# Altium PCB UART_CHANGER_ANDREY.PcbDoc
Units mm, origin at the board's own origin, x right, y up, seen from the top; angles counter-clockwise.
Board outline 55.96 x 65.35 mm, 2 copper layers (Top Layer, Bottom Layer), stack 1.032 mm thick; 90 components, 59 nets, 315 pads, 435 vias.
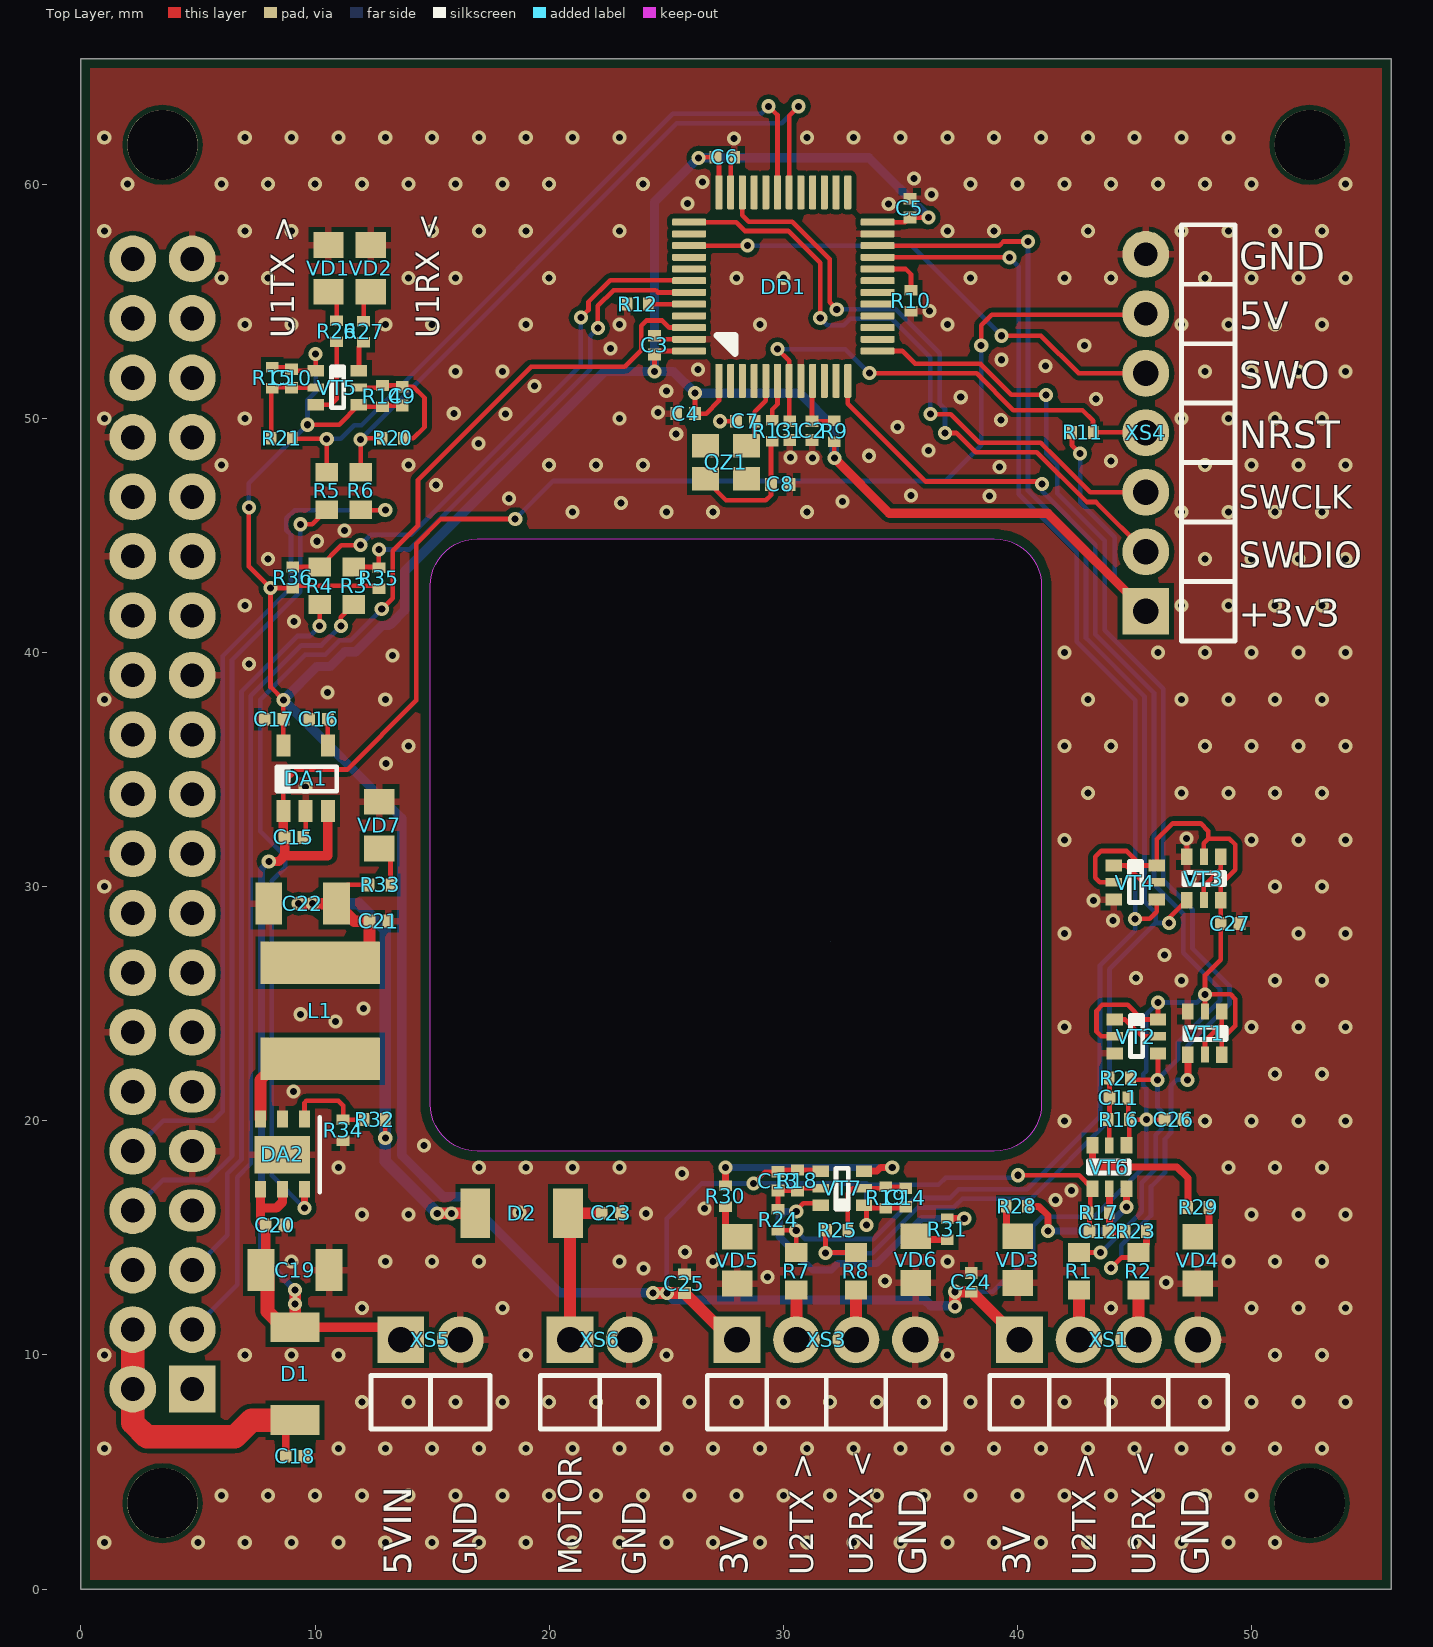
[diagram p0: Top Layer view]
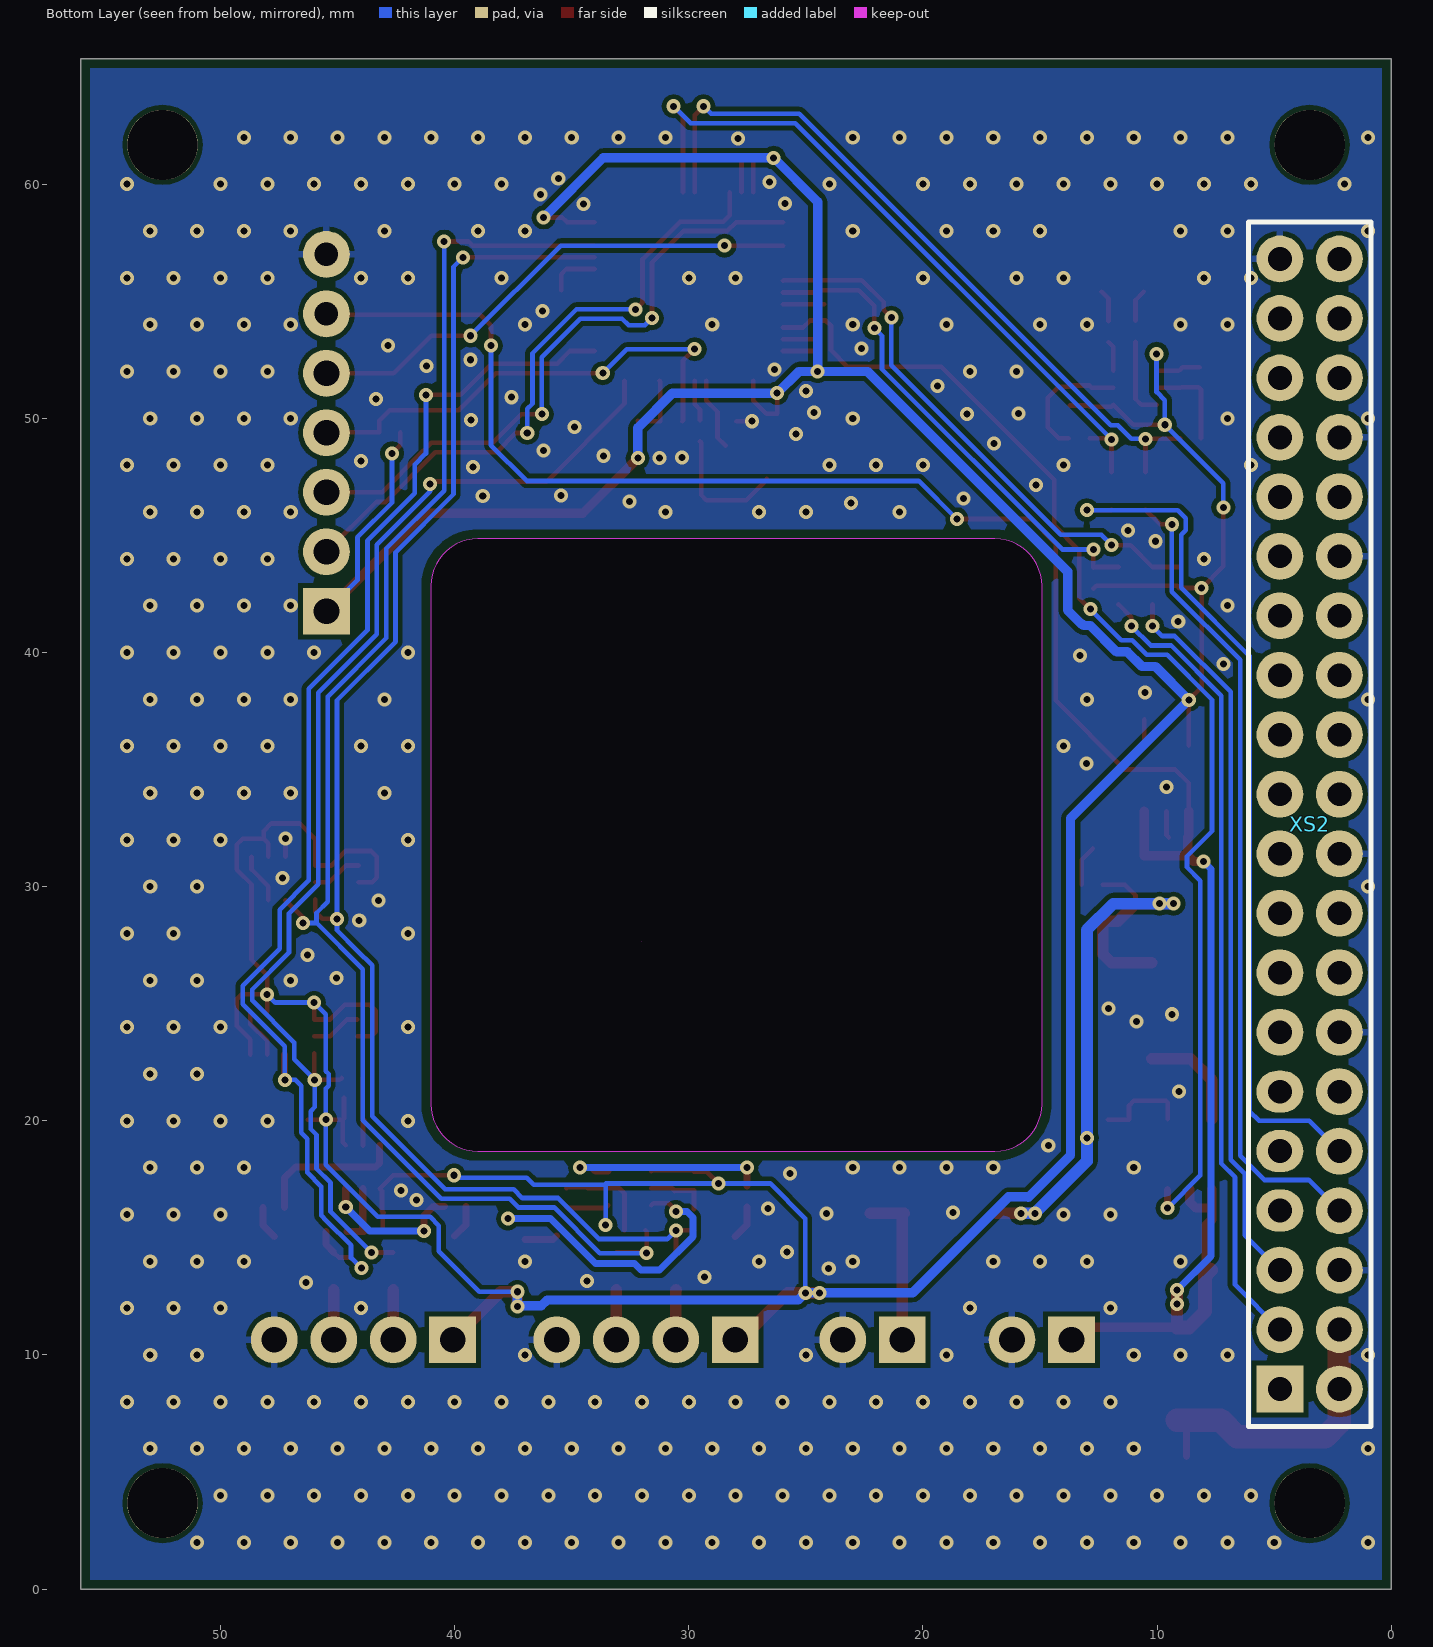
[diagram p1: Bottom Layer view, seen from below]

## Layer stack, top to bottom
Top Solder: solder mask 0.01, Solder Resist, Dk 3.5
Top Layer: signal copper 0.036
Dielectric 1: core 0.32, FR-4, Dk 4.8
Dielectric 2: prepreg 0.32, FR-4, Dk 4.8
Dielectric 3: core 0.32, FR-4, Dk 4.4
Bottom Layer: signal copper 0.036
Bottom Solder: solder mask 0.01, Solder Resist, Dk 3.5

## Board outline
0,0 55.963,0 55.963,65.35 0,65.35
cut-out: 14.918,20.712 14.918,42.843 cw(c16.925,42.843) 16.925,44.85 39.015,44.85 cw(c39.015,42.843) 41.022,42.843 41.022,20.712 cw(c39.015,20.712) 39.015,18.705 16.925,18.705 cw(c16.925,20.712)
cut-out: 32.025,27.675

## Design rules (kind name [scope] priority, off if disabled: settings)
BoardOutlineClearance [All] p1: gap=0.4 ignorepadtopadclearanceinfootprint=FALSE except(0: Arc-SplitContinuation Track-SplitContinuation SMDPad-SplitContinuation THPad-SplitContinuation Via-SplitContinuation Fill-SplitContinuation Poly-SplitContinuation Region-SplitContinuation Text-SplitContinuation)
Clearance Clearance_MAIN [All] p1: gap=0.2 ignorepadtopadclearanceinfootprint=FALSE
ComponentClearance ComponentClearance_XOR [InComponent('C2') or InComponent('C3') or InComponent('C7') vs InComponent('C4') or InComponent('C11')or InComponent('C9')] p1: gap=-5 collisioncheckmode=3 verticalgap=-5 showdistances=FALSE
ComponentClearance [All] p2: gap=0.1 collisioncheckmode=3 verticalgap=0.1 showdistances=FALSE
HoleSize [All] p1: absolutevalues=TRUE maxlimit=22 minlimit=0.3 maxpercent=80.000 minpercent=20.000
HoleToHoleClearance [All] p1: gap=0.3 allowstackedmicrovias=TRUE
MinimumAnnularRing [All] p1: minimumring=0.15
MinimumSolderMaskSliver [All] p1: minsoldermaskwidth=0.1
PlaneClearance [All] p1: clearance=0.25
PolygonConnect PolygonConnect_MAIN [All] p1: thpad.connectstyle=Relief thpad.reliefconductorwidth=0.3 thpad.reliefentries=4 thpad.polygonreliefangle="90 Angle" thpad.airgapwidth=0.2 smdpad.connectstyle=Relief smdpad.reliefconductorwidth=0.3 smdpad.reliefentries=4 smdpad.polygonreliefangle="90 Angle" smdpad.airgapwidth=0.2 via.connectstyle=Direct via.reliefconductorwidth=0.3 via.reliefentries=4 via.polygonreliefangle="90 Angle" via.airgapwidth=0.2
RoutingVias [All] p1: holewidth=0.3 width=0.6 viastyle="Through Hole" minholewidth=0.3 minwidth=0.6 maxholewidth=1 maxwidth=2
ShortCircuit ShortCircuit_ESD_RING [InNet('ESD_RING_A')] p1: allowed=TRUE
ShortCircuit [All] p2: allowed=FALSE
SilkToBoardRegionClearance [(ShowComment = 'True')] p1:
SilkToSilkClearance [All] p1: silktosilkclearance=0
SilkToSolderMaskClearance [IsPad] p1: minsilkscreentomaskgap=0.1 clearancetoexposedcopper=TRUE
SolderMaskExpansion SolderMaskExpansion_VIa [IsVia] p1: expansion=0.102 istentingtop=TRUE
SolderMaskExpansion [All] p2: expansion=0.05 istentingtop=FALSE
Width Width_MAIN [All] p1: maxlimit=5 minlimit=0.2 preferedwidth=0.2 substack1={708119B1-05ED-4D14-B21C-57B7C25CAC18} toplayer_{708119b1-05ed-4d14-b21c-57b7c25cac18}_minwidth=0.254 toplayer_{708119b1-05ed-4d14-b21c-57b7c25cac18}_maxwidth=0.254 toplayer_{708119b1-05ed-4d14-b21c-57b7c25cac18}_prefwidth=0.254 bottomlayer_{708119b1-05ed-4d14-b21c-57b7c25cac18}_minwidth=0.254 bottomlayer_{708119b1-05ed-4d14-b21c-57b7c25cac18}_maxwidth=1 bottomlayer_{708119b1-05ed-4d14-b21c-57b7c25cac18}_prefwidth=0.3
21 further rules are at their usual default settings.

## Classes and differential pairs
component class UART_CHANGER: C1 C2 C3 C4 C5 C6 C7 C8 DD1 QZ1 R1 R2 R3 R4 R5 R6 R7 R8 R9 R10 R11 R12 R13 R35 R36 VT1 VT2 VT3 VT4 XS1 XS2 XS3 XS4
component class POWER&INDICATION: C9 C10 C11 C12 C13 C14 C15 C16 C17 C18 C19 C20 C21 C22 C23 C24 C25 C26 C27 D1 D2 DA1 DA2 L1 R14 R15 R16 R17 R18 R19 R20 R21 R22 R23 R24 R25 R26 R27 R28 R29 R30 R31 R32 R33 R34 VD1 VD2 VD3 VD4 VD5 VD6 VD7 VT5 VT6 VT7 XS5 XS6

## Components (designator, comment, footprint, x,y, rotation, side; value= is the part's Value field where it differs from the comment)
C1 "10n" 0402#1 30.275,49.475 r270 top
C2 "100n" 0402#1 31.225,49.475 r270 top
C3 "100n" 0402#1 24.5,53.125 r90 top
C4 "100n" 0402#1 25.825,50.2 r180 top
C5 "100n" 0402#1 35.4,58.975 r90 top
C6 "100n" 0402#1 27.5,61.15 r180 top
C7 "10p" 0402#1 28.375,49.875 r180 top
C8 "10p" 0402#1 29.875,47.175 r0 top
C9 "10n" 0402#1 13.725,50.95 r90 top
C10 "10n" 0402#1 9,51.7 r270 top
C11 "10n" 0402#1 44.325,20.975 r180 top
C12 "10n" 0402#1 43.475,15.275 r0 top
C13 "10n" 0402#1 29.775,17.425 r270 top
C14 "10n" 0402#1 35.225,16.725 r90 top
C15 "100n" 0402#1 9.1,32.1 r0 top
C16 "100n" 0402#1 10.15,37.15 r180 top
C17 "100n" 0402#1 8.25,37.15 r180 top
C18 "100n" 0402#1 9.15,5.675 r0 top
C19 "47uF" 1206 9.15,13.625 r0 top
C20 "100n" 0402#1 8.3,15.55 r0 top
C21 "100n" 0402#1 12.725,28.525 r0 top
C22 "47uF" 1206 9.475,29.275 r180 top
C23 "100n" 0402#1 22.65,16.05 r0 top
C24 "100n" 0402#1 38.025,13.1 r90 top
C25 "100n" 0402#1 25.775,13.05 r90 top
C26 "100n" 0402#1 46.675,20.05 r0 top
C27 "100n" 0402#1 49.075,28.425 r0 top
D1 "SK56" SMB 9.15,9.2 r90 top
D2 "SK56" SMB 18.825,16.05 r0 top
DA1 "LP2985-30" SOT-23-5 9.6,34.625 r0 top
DA2 "ST1S06" DFN-6TP 8.6,18.55 r270 top
DD1 "STM32F103С8T6" LQFP-48-ST 30,55.625 r90 top
L1 "3u3" VLS6045 10.225,24.7 r90 top
QZ1 "12M" DSX221G 27.55,48.125 r90 top
R1 "10R" 0603 42.625,13.575 r90 top
R2 "10R" 0603 45.165,13.575 r90 top
R3 "10R" 0603 11.65,42.85 r270 top
R4 "10R" 0603 10.2,42.85 r270 top
R5 "10R" 0603 10.5,46.9 r270 top
R6 "10R" 0603 11.95,46.9 r270 top
R7 "10R" 0603 30.55,13.575 r90 top
R8 "10R" 0603 33.1,13.575 r90 top
R9 "0R" 0402#2 32.175,49.45 r90 top
R10 "10K" 0402#2 35.45,55.025 r90 top
R11 "10K" 0402#2 42.775,49.4 r0 top
R12 "10K" 0402#2 23.775,54.875 r0 top
R13 "0R" 0402#2 29.525,49.475 r270 top
R14 "4K7" 0402#2 12.875,50.95 r270 top
R15 "4K7" 0402#2 8.175,51.725 r90 top
R16 "4K7" 0402#2 44.325,20.05 r0 top
R17 "4K7" 0402#2 43.475,16.075 r180 top
R18 "4K7" 0402#2 30.6,17.45 r90 top
R19 "4K7" 0402#2 34.375,16.725 r270 top
R20 "4K7" 0402#2 13.325,49.15 r0 top
R21 "4K7" 0402#2 8.575,49.15 r180 top
R22 "4K7" 0402#2 44.375,21.825 r180 top
R23 "4K7" 0402#2 45.05,15.275 r180 top
R24 "4K7" 0402#2 29.775,15.775 r90 top
R25 "4K7" 0402#2 32.3,15.325 r0 top
R26 "100R" 0402#2 10.925,53.725 r270 top
R27 "100R" 0402#2 12.075,53.7 r270 top
R28 "100R" 0402#2 39.975,16.35 r0 top
R29 "100R" 0402#2 47.725,16.3 r180 top
R30 "100R" 0402#2 27.525,16.775 r90 top
R31 "100R" 0402#2 37,15.375 r90 top
R32 "150K" 0402#2 12.55,20.05 r0 top
R33 "100R" 0402#2 12.775,30.075 r180 top
R34 "47K" 0402#2 11.2,19.6 r90 top
R35 "10K" 0402#2 12.725,43.175 r90 top
R36 "10K" 0402#2 9.05,43.2 r90 top
VD1 "VL0805" VL0805 10.575,56.4 r270 top
VD2 "VL0805" VL0805 12.375,56.4 r270 top
VD3 "VL0805" VL0805 40,14.075 r90 top
VD4 "VL0805" VL0805 47.7,14.05 r90 top
VD5 "VL0805" VL0805 28.025,14.05 r90 top
VD6 "VL0805" VL0805 35.65,14.075 r90 top
VD7 "VL0805" VL0805 12.75,32.625 r270 top
VT1 "BC846BPDW1" SOT-363 48,23.75 r270 top
VT2 "BC846BPDW1" SOT-363 45.075,23.6 r0 top
VT3 "BC846BPDW1" SOT-363 47.95,30.35 r270 top
VT4 "BC846BPDW1" SOT-363 45.025,30.175 r0 top
VT5 "BC857BDW1T1G" SOT-363 10.95,51.3 r0 top
VT6 "BC857BDW1T1G" SOT-363 43.925,18.025 r90 top
VT7 "BC857BDW1T1G" SOT-363 32.525,17.125 r180 top
XS1 "PLS-4R" PLS-4R 40.085,10.65 r0 top
XS2 "PBD-40" PBВ-40 4.758,8.545 r90 bottom
XS3 "PLS-4R" PLS-4R 28.02,10.65 r0 top
XS4 "PLS-7R" PLS-7R 45.475,41.76 r90 top
XS5 "PLS-2R" PLS-2R 13.66,10.65 r0 top
XS6 "PLS-2R" PLS-2R 20.885,10.65 r0 top

## Footprints (in the part's own frame and the unit in brackets; to place one, negate y for a bottom-side part, rotate by r counter-clockwise, add the part's x,y. Pads: shape width x height; smd on the part's side, far side on the other; paste and mask are expansions set on the pad)
0402#1 [mm]
  rect 0.5x0.55 smd mask+0.05: 1(-0.4,0) 2(0.4,0)
  body extent -0.5,-0.25 0.5,0.25, height 0.55
0402#2 [mm]
  rect 0.45x0.55 smd paste-0.025 mask+0.05: 1(-0.45,0) 2(0.45,0)
  body extent -0.5,-0.25 0.5,0.25, height 0.38
0603 [mm]
  rect 0.8x0.95 smd mask+0.05: 1(-0.8,0) 2(0.8,0)
  body extent -0.8,-0.4 0.8,0.4, height 0.38
1206 [mm]
  rect 1.15x1.8 smd mask+0.1: 1(-1.45,0) 2(1.45,0)
  body extent -1.6,-0.8 1.6,0.8, height 1.25
DFN-6TP [mm]
  rect 0.71x0.46 smd: 1(-1.525,0.95) 2(-1.525,0.01) 3(-1.525,-0.93) 4(1.475,-0.93) 5(1.475,0.01) 6(1.475,0.95)
  rect 1.6x2.39 smd: 7(0,0)
  silkscreen extent -1.6,1.6 1.6,1.6, body extent -1.55,-1.49 1.55,1.51, height 0.78
DSX221G [mm]
  rect 1x1.15 smd mask+0.05: 1(-0.7,0.875) 2(-0.7,-0.875) 3(0.7,-0.875) 4(0.7,0.875)
  body extent -1,-1.25 1,1.25, height 0.9
LQFP-48-ST [mm]
  rrect30% 1.45x0.3 smd: 1(-4.025,2.75) 2(-4.025,2.25) 3(-4.025,1.75) 4(-4.025,1.25) 5(-4.025,0.75) 6(-4.025,0.25) 7(-4.025,-0.25) 8(-4.025,-0.75) 9(-4.025,-1.25) 10(-4.025,-1.75) 11(-4.025,-2.25) 12(-4.025,-2.75) 25(4.025,-2.75) 26(4.025,-2.25) 27(4.025,-1.75) 28(4.025,-1.25) 29(4.025,-0.75) 30(4.025,-0.25) 31(4.025,0.25) 32(4.025,0.75) 33(4.025,1.25) 34(4.025,1.75) 35(4.025,2.25) 36(4.025,2.75)
  rrect30% 0.3x1.45 smd: 13(-2.75,-4.025) 14(-2.25,-4.025) 15(-1.75,-4.025) 16(-1.25,-4.025) 17(-0.75,-4.025) 18(-0.25,-4.025) 19(0.25,-4.025) 20(0.75,-4.025) 21(1.25,-4.025) 22(1.75,-4.025) 23(2.25,-4.025) 24(2.75,-4.025) 37(2.75,4.025) 38(2.25,4.025) 39(1.75,4.025) 40(1.25,4.025) 41(0.75,4.025) 42(0.25,4.025) 43(-0.25,4.025) 44(-0.75,4.025) 45(-1.25,4.025) 46(-1.75,4.025) 47(-2.25,4.025) 48(-2.75,4.025)
  silkscreen extent -2.85,2.07 -2.09,2.83, body extent -4.51,-4.51 4.51,4.51, height 1.55
PBВ-40 [mm]
  rect 2x2 hole 1.016: 1(0,0)
  round 2 hole 1.016: 2(0,-2.54) 3(2.54,0) 4(2.54,-2.54) 5(5.08,0) 6(5.08,-2.54) 8(7.62,-2.54) 10(10.16,-2.54) 12(12.7,-2.54) 13(15.24,0) 14(15.24,-2.54) 15(17.78,0) 16(17.78,-2.54) 17(20.32,0) 18(20.32,-2.54) 19(22.86,0) 20(22.86,-2.54) 21(25.4,0) 22(25.4,-2.54) 23(27.94,0) 24(27.94,-2.54) 25(30.48,0) 26(30.48,-2.54) 27(33.02,0) 28(33.02,-2.54) 29(35.56,0) 30(35.56,-2.54) 31(38.1,0) 32(38.1,-2.54) 33(40.64,0) 34(40.64,-2.54) 35(43.18,0) 36(43.18,-2.54) 37(45.72,0) 38(45.72,-2.54) 39(48.26,0) 40(48.26,-2.54)
  oval 1.8x2 hole 1.016: 7(7.62,0) 9(10.16,0) 11(12.7,0)
  silkscreen extent -1.6,-3.89 49.84,1.34, body extent -1.52,-3.79 49.78,1.25, height 8.55
PLS-2R [mm]
  rect 2x2 hole 1.1: 1(0,0)
  round 2 hole 1.1: 2(2.54,0)
  silkscreen extent -1.27,-3.81 3.81,-1.52, body extent -1.27,-10.03 3.81,0.33, height 2.57
PLS-4R [mm]
  rect 2x2 hole 1.1: 1(0,0)
  round 2 hole 1.1: 2(2.54,0) 3(5.08,0) 4(7.62,0)
  silkscreen extent -1.27,-3.81 8.89,-1.52, body extent -1.27,-10.03 8.89,0.33, height 2.57
PLS-7R [mm]
  rect 2x2 hole 1.1: 1(0,0)
  round 2 hole 1.1: 2(2.54,0) 3(5.08,0) 4(7.62,0) 5(10.16,0)
  round 2 hole 1: 6(12.7,0) 7(15.24,0)
  silkscreen extent -1.27,-3.81 16.51,-1.52, body extent -1.27,-10.03 16.51,0.33, height 2.57
SMB [mm]
  rect 1.27x2.1 smd: 1(-1.98,0) 2(1.98,0)
  body extent -2.6,-1.8 2.6,1.8, height 2.4
SOT-23-5 [mm]
  rect 0.6x0.95 smd mask+0.05: 1(-0.95,-1.4) 2(0,-1.4) 3(0.95,-1.4) 4(0.95,1.4) 5(-0.95,1.4)
  silkscreen extent -1.23,-0.55 1.32,0.5, body extent -1.5,-1.5 1.5,1.5, height 1.3
SOT-363 [mm]
  rect 0.7x0.5 smd mask+0.05: 1(-0.92,0.725) 3(-0.92,-0.725) 4(0.925,-0.725) 6(0.925,0.725)
  rect 0.7x0.35 smd mask+0.05: 2(-0.92,0.009) 5(0.92,0.009)
  silkscreen extent -0.3,-0.85 0.32,0.93, body extent -1.06,-1.09 1.06,1.11, height 1.05
VL0805 [mm]
  rect 1.1x1.3 smd: 1(1,0) 2(-1,0)
  body extent -1.01,-0.62 1.01,0.63, height 1.1
VLS6045 [mm]
  rect 1.8x5.1 smd: 1(-2.05,0) 2(2.05,0)
  body extent -3,-3 3,3, height 4.54

## Part data
C1 C7 C8 C9 C10 C11 C12 C13 C14: library part C000001, "CAP 0402 100n", Manufacturer=Murata, Operating Temperature="-55°C ~ 155°C", Package=0, Tolerance=±1%, Voltage=100V, Check Footprint=A, Check Symbol=A, Part Number=C000001
C2 C3 C4 C5 C6 C15 C16 C17 C18 C20 C21 C23 C24 C25 C26 C27: library part C000001, "CAP 0402 100n", Manufacturer=Murata, Operating Temperature="-55°C ~ 155°C", Package=0402, Tolerance=±1%, Voltage=10V, Check Footprint=A, Check Symbol=A, Part Number=C000001
C19 C22: library part C000003, "CAP 1206 47uF 10V", Manufacturer=Murata, Operating Temperature="-55°C ~ 155°C", Package=1206, Tolerance=±1%, Voltage=10V, Check Footprint=A, Check Symbol=A, Part Number=C000003
D1 D2: library part VD00002, "60V 5A Schottky Diode", Manufacturer=SMC, Operating Temperature="-50°C ~ 150°C", Package=SMB, Check Footprint=A, Check Symbol=A, Part Number=VD00002
DA1: library part U00007, "150-mA Low-noise Low-dropout Regulator With Shutdown", Manufacturer=TI, Operating Temperature="-40°C ~ 125°C", Package=SOT-23-5, Check Footprint=B, Check Symbol=B, HelpURL=https://static.chipdip.ru/lib/170/DOC001170968.pdf, Part Number=U00007
DA2: library part U00027, "Synchronous rectification with inhibit, 1.5 A, 1.5 MHz fixed or / adjustable, step-down switching regulator", Manufacturer=ST, Operating Temperature="-30°C ~ 125°C", Package=DFN-6, Check Footprint=A, Check Symbol=A, Part Number=U00027
DD1: library part U00026, "32 Bit 72Mhz ARM MCU", Manufacturer=ST, Operating Temperature="-40°C ~ 85°C", Package=LQFP-48-ST, Check Footprint=A, Check Symbol=A, Part Number=U00026
L1: library part IND000010, "3u3H smd power induction", Manufacturer=TDK, Manufacturer Part Number=VLS6045EX-3R3N, Operating Temperature="-40°C ~ 105°C", Package=VLS6045, Check Footprint=A, Check Symbol=A, HelpURL=https://product.tdk.com/info/en/catalog/datasheets/inductor_commercial_power_vls6045ex_en.pdf, Part Number=IND000010
QZ1: library part QZ00002, "12M SMD QUARTZ", Manufacturer=NDK, Package=DSX221G, Check Footprint=A, Check Symbol=A, Part Number=QZ00002
R1 R2 R3 R4 R5 R6 R7 R8: library part R000195, "RES SMD", Manufacturer="Rohm Semiconductor", Operating Temperature="-55°C ~ 155°C", Package=0603, Power=0,1W, Temperature Coefficient=±200ppm/°C, Tolerance=±1%, Check Footprint=A, Check Symbol=A, HelpURL=http://rohmfs.rohm.com/en/products/databook/datasheet/passive/resistor/chip_resistor/esr.pdf, Part Number=R000195
R9 R13: library part R000001, "RES SMD", Manufacturer="Rohm Semiconductor", Operating Temperature="-55°C ~ 155°C", Package=0402, Power=0.063W, Temperature Coefficient=±200ppm/°C, Tolerance=±1%, Check Footprint=A, Check Symbol=A, HelpURL=http://rohmfs.rohm.com/en/products/databook/datasheet/passive/resistor/chip_resistor/esr.pdf, Part Number=R000001
R10 R11 R12 R35 R36: library part R000098, "RES SMD", Manufacturer="Rohm Semiconductor", Operating Temperature=0, Package=0402, Temperature Coefficient=±200ppm/°C, Tolerance=±1%, Check Footprint=A, Check Symbol=A, HelpURL=http://rohmfs.rohm.com/en/products/databook/datasheet/passive/resistor/chip_resistor/esr.pdf, Part Number=R000098, Power=0
R14 R15 R16 R17 R18 R19 R20 R21 R22 R23 R24 R25: library part R000090, "RES SMD", Manufacturer="Rohm Semiconductor", Operating Temperature="-55°C ~ 155°C", Package=0402, Power=0.063W, Temperature Coefficient=±200ppm/°C, Tolerance=±1%, Check Footprint=A, Check Symbol=A, HelpURL=http://rohmfs.rohm.com/en/products/databook/datasheet/passive/resistor/chip_resistor/esr.pdf, Part Number=R000090
R26 R27 R28 R29 R30 R31 R33: library part R000050, "RES SMD", Manufacturer="Rohm Semiconductor", Operating Temperature="-55°C ~ 155°C", Package=0402, Power=0.063W, Temperature Coefficient=±200ppm/°C, Tolerance=±1%, Check Footprint=A, Check Symbol=A, HelpURL=http://rohmfs.rohm.com/en/products/databook/datasheet/passive/resistor/chip_resistor/esr.pdf, Part Number=R000050
R32: library part R000126, "RES SMD", Manufacturer="Rohm Semiconductor", Operating Temperature="-55°C ~ 155°C", Package=0402, Power=0.063W, Temperature Coefficient=±200ppm/°C, Tolerance=±1%, Check Footprint=A, Check Symbol=A, HelpURL=http://rohmfs.rohm.com/en/products/databook/datasheet/passive/resistor/chip_resistor/esr.pdf, Part Number=R000126
R34: library part R000114, "RES SMD", Manufacturer="Rohm Semiconductor", Operating Temperature="-55°C ~ 155°C", Package=0402, Power=0.063W, Temperature Coefficient=±200ppm/°C, Tolerance=±1%, Check Footprint=A, Check Symbol=A, HelpURL=http://rohmfs.rohm.com/en/products/databook/datasheet/passive/resistor/chip_resistor/esr.pdf, Part Number=R000114
VD1 VD2 VD3 VD4 VD5 VD6 VD7: library part LED000002, "SMD LED 0805", Color=BLUE, Operating Temperature="-40°C ~ 85°C", Package=O805, Voltage=3,2, Check Footprint=A, Check Symbol=A, Part Number=LED000002
VT1 VT2 VT3 VT4: library part VT00002, "60V 100mA PNP/NPN Transistor", Manufacturer=ON, Operating Temperature="-55°C ~ 150°C", Package=SOT-363, Power=1,380W, Check Footprint=A, Check Symbol=A, HelpURL=http://shop.electronshik.ru/z/Datasheet/B/BC846BPDW1T1-Dhj.pdf, Part Number=VT00002
VT5 VT6 VT7: library part VT00009, "45V 100mA Dual PNP Transistor", Manufacturer=ON, Operating Temperature="-55°C ~ 150°C", Package=SOT-363, Power=0,380W, Check Footprint=A, Check Symbol=A, HelpURL=https://www.onsemi.com/pub/Collateral/BC856BDW1T1-D.PDF, Part Number=VT00009
XS1 XS3: library part XS00013, "4 PIN PLS right angle", Manufacturer=WE, Package=PLS, Check Footprint=A, Check Symbol=A, Part Number=XS00013
XS2: library part XS00012, Check Footprint=A, Check Symbol=A, Package=PBD-40, Part Number=XS00012
XS4: library part XS00003, "7 PIN PLS right angle", Manufacturer=TE, Package=PLS, Check Footprint=A, Check Symbol=A, Part Number=XS00003
XS5 XS6: library part XS00002, "2 PIN PLS right angle", Manufacturer=TE, Package=PLS, Check Footprint=A, Check Symbol=A, Part Number=XS00002

## Free pads (board coordinates)
  round 3 hole 3 unplated: 1(3.488,3.675) 1(3.488,61.675) 1(52.475,3.675) 1(52.475,61.675)

## Via types
v1: diameter 0.6, hole 0.3, Top Layer to Bottom Layer, tented both sides, 435 vias

## Nets (pads, with @x,y where several pads share a name; then routed paths per layer and width w, separated by ;. In a path a pad name is that pad's centre, name@x,y a point inside that pad or via, vN(x,y) a via of type N, cw(c..) or ccw(c..) an arc to the next point about the centre after c; other vN are vias at no path point)
3v0_FB: DA2.1 R32.1 R34.2 | length 4
  Top Layer w0.2: DA2.1 9.55,20.775 9.625,20.85 11,20.85 11.2,20.65 R34.2 R32.1
5v_EXT: C15.1 C19.1 C20.1 D1.2 DA1.1 DA1.3 DA2.4 DA2.5 XS4.6 XS5.1 | length 93.6
  Top Layer w0.2: DA1.1 8.65,34.425 9.225,35 11.375,35 14.325,37.95 14.325,44.65 15.375,45.7 v1(18.55,45.7) ; v1(38.45,53.1) 38.45,53.975 38.9,54.425 45.44,54.425 XS4.6
  Top Layer w0.4: DA2.4 7.67,16.275 ; C19.1 7.9,13.825 C20.1 7.67,15.78 7.67,16.275 ; v1(8.025,31.075) 8.45,31.075 8.7,31.325 ; DA2.5 8.61,16.535 8.35,16.275 7.67,16.275 ; DA1.1 8.65,32.15 C15.1 8.7,31.325 ; D1.2 13.13,11.18 XS5.1 ; DA1.3 10.55,31.325 8.7,31.325
  Top Layer w0.5: D1.2@9.15,11.15 v1(9.15,12.175) v1(9.15,12.775)
  Top Layer w0.6: C19.1 7.962,13.363 7.962,11.863 8.645,11.18 D1.2
  Bottom Layer w0.2: v1(18.55,45.7) 20.175,47.325 36.925,47.325 38.45,48.85 v1(38.45,53.1)
  Bottom Layer w0.3: v1(8.025,31.075) 7.708,30.758 7.708,14.217 v1(9.15,12.775)
5v_RPI: C18.1 D1.1 XS2.2 XS2.4 | length 13.2
  Top Layer w0.3: C18.1 8.75,6.82 D1.1
  Top Layer w1: XS2.4 XS2.2 2.218,7.107 2.825,6.5 6.575,6.5 7.295,7.22 D1.1
+3v0: C3.1 C4.1 C5.1 C6.2 C9.1 C10.1 C11.1 C12.1 C13.1 C14.1 C17.1 C24.1 C25.1 C26.1 C27.1 DA1.5 DD1.1 DD1.24 DD1.36 DD1.48 R9.1 R11.1 R14.2 R15.2 R16.2 R17.2 R18.2 R19.2 R35.1 R36.1 VT1.2 VT1.6 VT2.2 VT2.6 VT3.2 VT3.6 VT4.2 VT4.6 VT5.1 VT5.4 VT6.1 VT6.4 VT7.1 VT7.4 XS1.1 XS3.1 XS4.1 | length 260.3
  Top Layer w0.2: v1(7.175,46.2) 7.175,43.675 v1(8.1,42.75) ; R15.2 8.925,52.175 C10.1 9.075,52.025 VT5.1 10.03,52.745 v1(10.025,52.75) ; DA1.5 C17.1 v1(8.65,37.975) 8.1,38.525 v1(8.1,42.75) ; v1(9.675,49.725) 11.025,49.725 VT5.4 11.95,50.5 R14.2 12.925,50.55 C9.1 ; R35.1 12.6,42.85 9.15,42.85 R36.1 v1(8.1,42.75) ; v1(24.5,52) C3.1 24.65,52.875 DD1.48 ; v1(26.225,51.075) C4.1 26.7,50.2 27.25,50.75 DD1.1 ; v1(26.375,61.125) 26.4,61.15 C6.2 27.25,61 DD1.36 ; v1(28.725,17.325) 29.225,17.825 C13.1 29.85,17.9 R18.2 31.55,17.9 VT7.4 ; v1(32.175,48.3) R9.1 ; VT7.1 VT7.1@33.55,16.295 ; v1(33.55,15.55) VT7.1@33.55,16.295 ; DD1.24 35.2,58.375 C5.1 v1(36.2,58.575) ; C14.1 35.175,16.275 R19.2 33.57,16.275 VT7.1@33.55,16.295 ; v1(40.025,17.675) 42.63,17.675 VT6.1 43.105,17.01 43.105,16.155 R17.2 43.075,16.025 C12.1 ; R11.1 42.325,48.85 v1(42.675,48.5) ; VT4.2 43.516,30.184 43.325,30.375 43.325,31.275 43.575,31.525 44.65,31.525 45.275,30.9 VT4.6 45.95,32.025 46.625,32.7 47.825,32.7 48.15,32.375 48.15,32.05 ; VT2.2 43.566,23.609 43.375,23.8 43.375,24.7 43.625,24.95 44.7,24.95 45.325,24.325 VT2.6 v1(46,25.05) ; VT6.4 44.775,19.075 R16.2 ; C11.1 44.725,20.1 R16.2 ; C26.1 v1(45.5,20.05) R16.2 ; VT3.2 47.959,31.859 48.15,32.05 ; VT1.2 v1(48.009,25.4) ; VT1.6 48.725,23.475 49.3,24.05 49.3,25.2 49.1,25.4 v1(48.009,25.4) ; v1(48.009,25.4) 48.009,26.209 48.675,26.875 C27.1 VT3.6 48.675,30.1 49.3,30.725 49.3,31.8 49.05,32.05 48.15,32.05
  Top Layer w0.4: v1(32.175,48.3) 34.525,45.95 41.285,45.95 XS4.1
  Top Layer w0.5: v1(24.425,12.65) v1(25.025,12.65) C25.1 27.775,10.65 XS3.1 ; v1(37.325,12.075) v1(37.325,12.7) C24.1 38.035,12.7 XS1.1
  Bottom Layer w0.2: v1(7.175,46.2) 7.175,47.225 v1(9.675,49.725) 9.675,50.775 10.025,51.125 v1(10.025,52.75) ; v1(25.025,12.65) 25.025,15.825 26.525,17.325 v1(28.725,17.325) 33.55,17.325 v1(33.55,15.55) ; 33.55,17.275 36.625,17.275 36.925,17.575 40.025,17.575 v1(40.025,17.675) ; v1(37.325,12.7) 38.95,12.7 40.675,14.425 40.675,15.524 41.051,15.9 43.275,15.9 45.5,18.125 v1(45.5,20.05) 45.5,21.376 45.375,21.501 45.375,21.999 45.5,22.124 45.5,24.55 v1(46,25.05) 47.659,25.05 v1(48.009,25.4) ; v1(42.675,48.5) 42.675,46.388 44.15,44.913 44.15,43.085 XS4.1
  Bottom Layer w0.4: v1(32.175,48.3) 32.175,49.6 30.7,51.075 v1(26.225,51.075) 25.3,52 v1(24.5,52) ; v1(36.2,58.575) 33.65,61.125 v1(26.375,61.125) 24.5,59.25 v1(24.5,52) ; v1(37.325,12.7) v1(37.325,12.075) 37.3,12.1 36.3,12.1 36.05,12.35 25.325,12.35 v1(25.025,12.65) v1(24.425,12.65) 20.45,12.65 16.35,16.75 15.53,16.75 15.503,16.722 13.7,18.525 13.7,32.925 v1(8.65,37.975) 10.075,39.4 10.648,39.4 11.273,40.025 11.732,40.025 12.857,41.15 13.14,41.15 13.19,41.2 13.225,41.2 13.825,41.8 13.825,43.458 22.367,52 v1(24.5,52)
+3v0_Motor: C23.1 D2.2 XS6.1 | length 6.9
  Top Layer w0.5: XS6.1 20.885,15.97 D2.2 C23.1
+3v0a: C2.1 DD1.9 R9.2 | length 2.7
  Top Layer w0.2: DD1.9 31.225,51.575 C2.1 32.15,49.875 R9.2
+3v3: C21.1 C22.1 D2.1 L1.2 R32.2 R33.2 | length 29.1
  Top Layer w0.2: C22.1 10.925,29.625 11.375,30.075 R33.2 ; v1(13,19.275) R32.2
  Top Layer w0.5: v1(9.3,29.275) v1(9.9,29.275) C22.1 11.675,28.525 C21.1 12.325,27.125 11.95,26.75 L1.2 ; v1(15.22,16.05) v1(15.82,16.05) D2.1
  Bottom Layer w0.5: v1(9.3,29.275) v1(9.9,29.275) 11.875,29.275 13,28.15 v1(13,19.275) 13,18.27 v1(15.22,16.05) v1(15.82,16.05)
BOOT0: DD1.44 R12.2 | length 1.8
  Top Layer w0.2: R12.2 DD1.44
BOOT1: DD1.20 R10.2 | length 2.2
  Top Layer w0.2: DD1.20 35.225,56.375 35.45,56.15 R10.2
BYP: C16.1 DA1.4 | length 1.1
  Top Layer w0.2: DA1.4 C16.1
EN_MOTOR: DA2.6 DD1.46 | length 51.9
  Top Layer w0.2: v1(12.85,41.85) 13.325,42.325 13.325,44.35 14.4,45.425 14.4,47.375 19.225,52.2 23.225,52.2 23.925,52.9 23.925,53.95 24.15,54.175 24.825,54.175 25.125,53.875 DD1.46
  Top Layer w0.3: v1(9.55,16.275) DA2.6
  Bottom Layer w0.2: v1(9.55,16.275) 8.158,17.667 8.158,30.258 8.725,30.825 8.725,31.3 7.658,32.367 7.658,37.983 9.575,39.9 10.425,39.9 10.441,39.9 11.066,40.525 11.525,40.525 v1(12.85,41.85)
GND: C1.2 C2.2 C3.2 C4.2 C5.2 C6.1 C7.2 C8.2 C15.2 C16.2 C17.2 C18.2 C19.2 C20.2 C21.2 C22.2 C23.2 C24.2 C25.2 C26.2 C27.2 DA1.2 DA2.2 DA2.7 DD1.8 DD1.23 DD1.35 DD1.47 R10.1 R12.1 R34.1 VD1.2 VD2.2 VD3.2 VD4.2 VD5.2 VD6.2 VD7.2 VT1.3 VT2.3 VT3.3 VT4.3 XS1.4 XS2.6 XS2.9 XS2.14 XS2.20 XS2.25 XS2.30 XS2.34 XS2.39 XS3.4 XS4.7 XS5.2 XS6.2 | length 5.7
  Top Layer w0.2: C15.2 9.6,32.2 DA1.2 ; C3.2 24.65,53.375 DD1.47 ; v1(27.3,49.875) C7.2 ; DD1.35 27.75,61 C6.1 ; VT3.3 v1(47.225,32.05)
  other v1: 1,2 5,2 7,2 9,2 11,2 13,2 15,2 17,2 19,2 21,2 23,2 25,2 27,2 29,2 31,2 33,2 35,2 37,2 39,2 41,2 43,2 45,2 47,2 49,2 51,2 6,4 8,4 10,4 12,4 14,4 16,4 18,4 20,4 22,4 24,4 26,4 28,4 30,4 32,4 34,4 36,4 38,4 40,4 42,4 44,4 46,4 48,4 50,4 1,6 11,6 13,6 15,6 17,6 19,6 21,6 23,6 25,6 27,6 29,6 31,6 33,6 35,6 37,6 39,6 41,6 43,6 45,6 47,6 49,6 51,6 53,6 12,8 14,8 16,8 18,8 20,8 22,8 24,8 26,8 28,8 30,8 32,8 34,8 36,8 38,8 40,8 42,8 44,8 46,8 48,8 50,8 52,8 54,8 1,10 7,10 9,10 11,10 19,10 25,10 37,10 51,10 53,10 12,12 18,12 44,12 50,12 52,12 54,12 46.35,13.1 34.35,13.15 29.325,13.325 24.025,13.7 9,14 13,14 15,14 17,14 23,14 27,14 37,14 49,14 51,14 53,14 25.8,14.4 12,16 14,16 50,16 52,16 54,16 24.125,16.05 18.725,16.075 26.625,16.25 41.625,16.625 42.3,17.025 25.675,17.75 11,18 17,18 19,18 21,18 23,18 49,18 51,18 53,18 14.65,18.95 42,20 48,20 50,20 52,20 54,20 9.075,21.25 51,22 53,22 42,24 50,24 52,24 54,24 10.875,24.25 9.375,24.55 12.075,24.8 47,26 51,26 53,26 45.05,26.1 46.275,27.075 42,28 52,28 54,28 44.075,28.55 43.25,29.4 1,30 51,30 53,30 47.35,30.375 42,32 50,32 52,32 54,32 43,34 47,34 49,34 51,34 53,34 9.6,34.25 13.025,35.25 14,36 42,36 44,36 48,36 50,36 52,36 54,36 1,38 13,38 43,38 47,38 49,38 51,38 53,38 10.525,38.3 7.175,39.5 13.3,39.875 42,40 46,40 48,40 50,40 52,40 54,40 9.1,41.325 7,42 47,42 49,42 51,42 53,42 8,44 48,44 50,44 52,44 54,44 10.075,44.75 11.25,45.2 21,46 25,46 27,46 31,46 47,46 49,46 51,46 53,46 23.075,46.375 32.525,46.45 18.275,46.575 38.8,46.675 35.45,46.7 15.175,47.15 39.225,47.925 6,48 14,48 20,48 22,48 24,48 48,48 50,48 52,48 54,48 44,48.175 31.25,48.3 30.3,48.325 33.65,48.4 36.2,48.625 16.975,48.925 25.425,49.325 34.875,49.625 39.3,49.925 1,50 7,50 23,50 47,50 49,50 51,50 53,50 18.125,50.175 15.925,50.2 24.65,50.25 43.35,50.825 37.575,50.9 25,51.175 19.375,51.375 16,52 18,52 48,52 50,52 52,52 54,52 26.35,52.075 41.2,52.225 39.325,52.5 22.625,52.975 42.85,53.1 7,54 9,54 13,54 15,54 19,54 23,54 29,54 37,54 47,54 49,54 51,54 53,54 36.25,54.575 6,56 8,56 14,56 16,56 20,56 28,56 30,56 38,56 42,56 44,56 48,56 50,56 52,56 54,56 1,58 7,58 9,58 15,58 17,58 19,58 23,58 37,58 39,58 43,58 47,58 49,58 51,58 53,58 34.5,59.15 25.9,59.175 36.325,59.55 2,60 6,60 8,60 10,60 12,60 14,60 16,60 18,60 20,60 24,60 38,60 40,60 42,60 44,60 46,60 48,60 50,60 54,60 26.55,60.1 35.575,60.25 27.9,61.95 1,62 7,62 9,62 11,62 13,62 15,62 17,62 19,62 21,62 23,62 31,62 33,62 35,62 37,62 39,62 41,62 43,62 45,62 47,62 49,62
I2C_CLK: DD1.42 R4.1 R36.2 | length 23.4
  Top Layer w0.2: R36.2 R4.1 11.125,44.575 11.968,44.575 v1(11.949,44.594) ; v1(21.35,54.3) 21.675,54.625 21.675,54.7 21.675,54.966 22.609,55.9 25.95,55.9 DD1.42
  Bottom Layer w0.2: v1(11.949,44.594) 12.38,45.025 14.109,45.025 21.35,52.266 v1(21.35,54.3)
I2C_SDA: DD1.43 R3.1 R35.2 | length 21.1
  Top Layer w0.2: R3.1 12.7,43.65 R35.2 v1(12.725,44.4) ; v1(22.075,53.85) 22.075,54.8 22.75,55.475 24.549,55.475 24.649,55.375 DD1.43
  Bottom Layer w0.2: v1(12.725,44.4) 14.05,44.4 21.75,52.1 21.75,53.525 v1(22.075,53.85)
NetC8_1: C8.1 QZ1.1 R13.2 | length 5.6
  Top Layer w0.2: QZ1.1 26.675,47.375 27.55,46.5 29.25,46.5 29.475,46.725 C8.1 29.475,48.975 R13.2
NetC9_2: C9.2 R14.1 R20.2 VT5.5 | length 5.4
  Top Layer w0.2: VT5.5 12.784,51.309 R14.1 13.675,51.4 C9.2 14.2,51.35 14.675,50.875 14.675,49.625 14.2,49.15 R20.2
NetC10_2: C10.2 R15.1 R21.2 VT5.2 | length 4
  Top Layer w0.2: R21.2 8.125,51.225 R15.1 8.225,51.325 8.975,51.325 C10.2 10.021,51.3 VT5.2
NetC11_2: C11.2 R16.1 R22.2 VT6.5 | length 2.9
  Top Layer w0.2: VT6.5 43.916,20.009 R16.1 43.925,20.1 C11.2 R22.2
NetC12_2: C12.2 R17.1 R23.2 VT6.2 | length 2.6
  Top Layer w0.3: VT6.2 43.925,17.096 R17.1 43.925,15.325 C12.2 R23.2
NetC13_2: C13.2 R18.1 R24.2 VT7.5 | length 2.7
  Top Layer w0.2: R24.2 C13.2 30.225,17.025 30.575,17.025 R18.1 30.716,17.116 VT7.5
NetC14_2: C14.2 R19.1 R25.2 VT7.2 | length 4.2
  Top Layer w0.2: R25.2 32.75,16.9 32.966,17.116 VT7.2 34.316,17.116 R19.1 35.175,17.175 C14.2
NetR26_1: R26.1 VD1.1 | length 1.4
  Top Layer w0.2: VD1.1 10.925,55.05 R26.1
NetR26_2: R26.2 VT5.3 | length 3.4
  Top Layer w0.2: VT5.3 10.675,50.575 10.925,50.825 R26.2
NetR27_1: R27.1 VD2.1 | length 1.4
  Top Layer w0.2: R27.1 12.075,55.1 VD2.1
NetR27_2: R27.2 VT5.6 | length 1.3
  Top Layer w0.2: VT5.6 11.875,53.05 R27.2
NetR28_1: R28.1 VD3.1 | length 1.5
  Top Layer w0.3: R28.1 39.525,15.55 VD3.1
NetR28_2: R28.2 VT6.3 | length 6.2
  Top Layer w0.3: R28.2 40.9,16.35 41.3,15.95 v1(41.3,15.3) ; v1(44.65,16.324) VT6.3
  Bottom Layer w0.3: v1(41.3,15.3) 43.626,15.3 v1(44.65,16.324)
NetR29_1: R29.1 VD4.1 | length 1.4
  Top Layer w0.3: VD4.1 48.175,15.525 R29.1
NetR29_2: R29.2 VT6.6 | length 6.3
  Top Layer w0.3: VT6.6 43.2,18.2 43.375,18.025 46.8,18.025 47.275,17.55 R29.2
NetR30_1: R30.1 VD5.1 | length 1.5
  Top Layer w0.3: R30.1 27.525,15.55 VD5.1
NetR30_2: R30.2 VT7.3 | length 9.2
  Top Layer w0.3: R30.2 v1(27.525,18) ; VT7.3 33.994,17.85 34.144,18 v1(34.65,18)
  Bottom Layer w0.3: v1(27.525,18) v1(34.65,18)
NetR31_1: R31.1 VD6.1 | length 1.4
  Top Layer w0.3: VD6.1 35.8,14.925 R31.1
NetR31_2: R31.2 VT7.6 | length 13.1
  Top Layer w0.2: v1(30.55,16.125) 30.5,16.125 30.85,16.475 31.525,16.475 VT7.6
  Top Layer w0.3: R31.2 v1(37.725,15.825)
  Bottom Layer w0.3: v1(30.55,16.125) 30.075,16.125 29.825,15.875 29.825,15.05 31.25,13.625 32.05,13.625 32.325,13.9 33.986,13.9 35.911,15.825 v1(37.725,15.825)
NetR33_1: R33.1 VD7.1 | length 1.7
  Top Layer w0.2: VD7.1 13.225,31.15 R33.1
NetVT1_1: VT1.1 VT1.5 | length 2.1
  Top Layer w0.2: VT1.5 48.009,23.41 48.725,24.126 VT1.1
NetVT2_1: VT2.1 VT2.5 | length 2.1
  Top Layer w0.2: VT2.1 44.6,24.325 45.316,23.609 VT2.5
NetVT3_1: VT3.1 VT3.5 | length 2.1
  Top Layer w0.2: VT3.5 47.959,30.018 48.675,30.734 VT3.1
NetVT4_1: VT4.1 VT4.5 | length 2.1
  Top Layer w0.2: VT4.1 44.65,30.9 45.366,30.184 VT4.5
NRST: C1.1 DD1.7 R11.2 XS4.4 | length 20.8
  Top Layer w0.2: v1(29.75,52.95) 30.25,52.45 DD1.7 30.25,49.9 C1.1 ; v1(33.675,51.925) 38.25,51.925 39.825,50.35 42.775,50.35 43.225,49.9 R11.2 45.455,49.4 XS4.4
  Bottom Layer w0.2: v1(29.75,52.95) 32.65,52.95 v1(33.675,51.925)
OSC_IN: C7.1 DD1.5 QZ1.3 | length 3.1
  Top Layer w0.2: QZ1.3 28.775,49.175 C7.1 28.775,50.275 29.25,50.75 DD1.5
OSC_OUT: DD1.6 R13.1 | length 1.8
  Top Layer w0.2: R13.1 29.525,50.375 29.75,50.6 DD1.6
R_CLK: R4.2 XS2.5 | length 31
  Top Layer w0.2: v1(10.2,41.125) R4.2
  Bottom Layer w0.2: XS2.5 6.25,15.117 6.25,17.734 6.575,18.059 6.858,18.342 6.858,37.783 6.858,38.314 9.244,40.7 9.775,40.7 v1(10.2,41.125)
R_SDA: R3.2 XS2.3 | length 34.3
  Top Layer w0.2: v1(11.1,41.125) 11.1,41.5 R3.2
  Bottom Layer w0.2: XS2.3 6.675,13.002 6.675,17.594 7.258,18.176 7.258,37.858 7.258,38.148 9.409,40.3 9.7,40.3 10.275,40.3 v1(11.1,41.125)
RPI_U0_RXD: R6.2 XS2.10 | length 36.6
  Top Layer w0.2: R6.2 11.975,46.075 v1(13,46.075)
  Bottom Layer w0.2: XS2.10 3.513,20 5.65,20 6.058,20.408 6.058,39.608 6.058,39.848 8.975,42.766 8.975,45.026 8.775,45.226 8.775,45.724 9.126,46.075 9.375,46.075 v1(13,46.075)
RPI_U0_TXD: R5.2 XS2.8 | length 34.8
  Top Layer w0.2: v1(9.375,45.475) 9.875,45.475 R5.2
  Bottom Layer w0.2: XS2.8 3.528,17.475 5.425,17.475 6.458,18.508 6.458,21.092 6.458,39.683 9.375,42.6 v1(9.375,45.475)
SW: DA2.3 L1.1 | length 4.6
  Top Layer w0.5: DA2.3 7.67,21.745 8.575,22.65 L1.1
SWDCLK: DD1.37 XS4.3 | length 27.3
  Top Layer w0.2: DD1.37 27.984,58.375 28.359,58 30.209,58 31.575,56.634 v1(31.575,54.275) ; v1(36.275,50.175) 37.15,50.175 38.375,48.95 40.991,48.95 41.166,48.775 41.441,48.5 43.101,46.84 XS4.3
  Bottom Layer w0.2: v1(31.575,54.275) 31.875,53.975 32.575,53.975 32.853,54.253 34.632,54.253 36.275,52.609 v1(36.275,50.175)
SWDIO: DD1.34 XS4.2 | length 27.1
  Top Layer w0.2: DD1.34 28.25,58.675 28.525,58.4 30.375,58.4 31.975,56.8 31.975,54.95 32.275,54.65 32.278,54.653 v1(32.28,54.653) ; v1(36.9,49.375) 37.384,49.375 38.209,48.55 40.825,48.55 42.95,46.425 43.35,46.425 XS4.2
  Bottom Layer w0.2: v1(32.28,54.653) 34.797,54.653 36.675,52.775 36.675,50.625 36.9,50.4 v1(36.9,49.375)
SWO: DD1.39 XS4.5 | length 21.8
  Top Layer w0.2: DD1.39 v1(28.475,57.375) ; v1(39.325,53.525) 41,53.525 42.605,51.92 XS4.5
  Bottom Layer w0.2: v1(28.475,57.375) 35.475,57.375 v1(39.325,53.525)
U1_RX: DD1.31 R5.1 R21.1 | length 31.5
  Top Layer w0.2: R21.1 9.05,49.125 v1(10.5,49.125) R5.1 ; v1(29.375,63.325) 29.75,62.95 DD1.31
  Bottom Layer w0.2: v1(10.5,49.125) 11.1,49.125 11.675,49.7 11.984,49.7 25.284,63 25.775,63 29.05,63 v1(29.375,63.325)
U1_TX: DD1.30 R6.1 R20.1 | length 30.8
  Top Layer w0.2: R6.1 v1(11.95,49.1) 12,49.15 R20.1 ; DD1.30 30.25,62.925 v1(30.65,63.325)
  Bottom Layer w0.2: v1(11.95,49.1) 25.45,62.6 29.925,62.6 v1(30.65,63.325)
U2_RX: DD1.13 R2.2 R23.1 VT1.4 | length 54.5
  Top Layer w0.2: DD1.13 35.075,52.875 35.625,52.325 38.25,52.325 38.416,52.325 39.741,51 v1(41.225,51) ; v1(43.987,13.705) 44.448,14.166 44.956,14.166 R2.2
  Top Layer w0.3: R2.2 45.5,14.71 R23.1 ; v1(47.25,21.75) 47.275,21.775 VT1.4
  Bottom Layer w0.2: v1(41.225,51) 41.225,48.5 41.7,48.025 41.7,46.797 43.725,44.772 43.725,40.95 46.225,38.45 46.225,30.266 47.475,29.016 47.475,28.334 47.475,27.348 49.05,25.773 49.05,25.575 49.05,24.975 47.25,23.175 v1(47.25,21.75) 46.8,21.75 46.55,21.5 46.55,19.484 46.3,19.234 46.3,17.794 45.7,17.194 45.7,15.959 45.475,15.734 44.425,14.684 44.425,14.143 v1(43.987,13.705)
U2_TX: DD1.12 R1.2 R22.1 VT2.4 | length 52.2
  Top Layer w0.2: DD1.12 32.75,50.625 36.075,47.3 40.95,47.3 v1(41.05,47.2) ; R1.2 v1(43.55,14.375) ; R22.1 44.9,21.75 v1(45.975,21.75) 46,21.775 VT2.4
  Bottom Layer w0.2: v1(41.05,47.2) 41.05,46.881 43.325,44.606 43.325,40.784 45.825,38.284 45.825,30.1 47.075,28.85 47.075,28.5 47.075,27.183 48.65,25.608 48.65,25.141 46.85,23.341 46.85,22.975 46.85,22.625 v1(45.975,21.75) 45.975,20.589 46.15,20.414 46.15,19.65 45.9,19.4 45.9,17.959 45.3,17.359 45.3,16.125 v1(43.55,14.375)
U2C_RX: R2.1 XS1.3 | length 2.1
  Top Layer w0.5: XS1.3 R2.1
U2C_TX: R1.1 XS1.2 | length 2.1
  Top Layer w0.5: XS1.2 R1.1
U3_RX: DD1.22 R8.2 R25.1 VT3.4 | length 65.7
  Top Layer w0.2: R25.1 31.8,15.275 v1(31.8,14.35) 31.825,14.375 R8.2 ; DD1.22 39.225,57.375 39.4,57.55 v1(40.45,57.55) ; v1(46.475,28.45) 46.475,28.675 VT3.4
  Bottom Layer w0.2: v1(31.8,14.35) 33.8,14.35 35.75,16.3 37.275,16.3 37.65,16.675 40.575,16.675 43.925,20.025 43.925,26.475 45.9,28.45 ; v1(40.45,57.55) 40.45,46.916 42.925,44.441 42.925,40.75 42.925,40.619 45.425,38.119 45.425,29.35 45.9,28.875 45.9,28.45 ; v1(46.475,28.45) 45.9,28.45
U3_TX: DD1.21 R7.2 R24.1 VT4.4 | length 63.8
  Top Layer w0.2: R24.1 v1(30.55,15.325) R7.2 ; DD1.21 v1(39.65,56.875) ; v1(45.025,28.625) 45.65,28.625 45.95,28.925 VT4.4
  Bottom Layer w0.2: v1(30.55,15.325) 30.925,14.95 33.834,14.95 35.584,16.7 37.109,16.7 37.484,17.075 40.409,17.075 43.525,20.191 43.525,26.641 44.15,27.266 45.025,28.141 v1(45.025,28.625) 45.025,37.953 42.525,40.453 42.525,40.925 42.525,44.275 40.05,46.75 40.05,56.475 v1(39.65,56.875)
U3C_RX: R8.1 XS3.3 | length 2.1
  Top Layer w0.5: XS3.3 R8.1
U3C_TX: R7.1 XS3.2 | length 2.1
  Top Layer w0.5: R7.1 30.56,12.765 XS3.2
pads on no net: DD1.2 DD1.3 DD1.4 DD1.10 DD1.11 DD1.14 DD1.15 DD1.16 DD1.17 DD1.18 DD1.19 DD1.25 DD1.26 DD1.27 DD1.28 DD1.29 DD1.32 DD1.33 DD1.38 DD1.40 DD1.41 DD1.45 QZ1.2 QZ1.4 XS2.1 XS2.7 XS2.11 XS2.12 XS2.13 XS2.15 XS2.16 XS2.17 XS2.18 XS2.19 XS2.21 XS2.22 XS2.23 XS2.24 XS2.26 XS2.27 XS2.28 XS2.29 XS2.31 XS2.32 XS2.33 XS2.35 XS2.36 XS2.37 XS2.38 XS2.40

## Polygon pours and split planes (outlines as drawn)
GND on Top Layer "TOP_GND" (solid, remove dead copper, pour order 1): 0,0 0,65.5 56,65.5 56,0
GND on Bottom Layer "BOT_GND" (solid, remove dead copper, pour order 0): 0,0 0,65.5 56,65.5 56,0

## Other copper
Top Layer:
  region: 20.885,10.65

## Silkscreen, mask and mechanical layers (free items; w line width, h text height)
Top Overlay:
  text "GND" at 49.475,55.949 h2
  text "U1TX >" at 9.455,53.412 h1.7 r90
  text "U1RX <" at 15.655,53.412 h1.7 r90
  text "5V" at 49.475,53.41 h2
  text "SWO" at 49.475,50.87 h2
  text "NRST" at 49.475,48.329 h2
  text "SWCLK" at 49.455,45.789 h1.7
  text "SWDIO" at 49.455,43.249 h1.9
  text "+3v3" at 49.455,40.71 h2
  text "5VIN" at 14.5,0.6 h2 r90
  text "GND" at 17.25,0.6 h1.7 r90
  text "MOTOR" at 21.725,0.6 h1.7 r90
  text "GND" at 24.475,0.6 h1.7 r90
  text "3V" at 28.86,0.6 h2 r90
  text "U2TX >" at 31.61,0.6 h1.7 r90
  text "U2RX <" at 34.15,0.6 h1.7 r90
  text "GND" at 36.48,0.6 h2 r90
  text "3V" at 40.925,0.6 h2 r90
  text "U2TX >" at 43.675,0.6 h1.7 r90
  text "U2RX <" at 46.215,0.6 h1.7 r90
  text "GND" at 48.545,0.6 h2 r90
BOARD_OUTLINE:
  lines w0.2: 0,0 0,65.35 55.963,65.35 55.963,0 0,0 ; 14.918,20.712 ccw(c16.925,20.712) 16.925,18.705 39.015,18.705 ccw(c39.015,20.712) 41.022,20.712 41.022,42.843 ccw(c39.015,42.843) 39.015,44.85 16.925,44.85 ccw(c16.925,42.843) 14.918,42.843 14.918,20.712